# Altium PCB PCB1.PcbDoc
Units mil, origin at the board's own origin, x right, y up, seen from the top; angles counter-clockwise.
Board outline 6000 x 4000 mil, 2 copper layers (Top Layer, Bottom Layer); 20 components, 32 nets, 129 pads, 0 vias.
Unrouted connection lines stored in the file: 71.
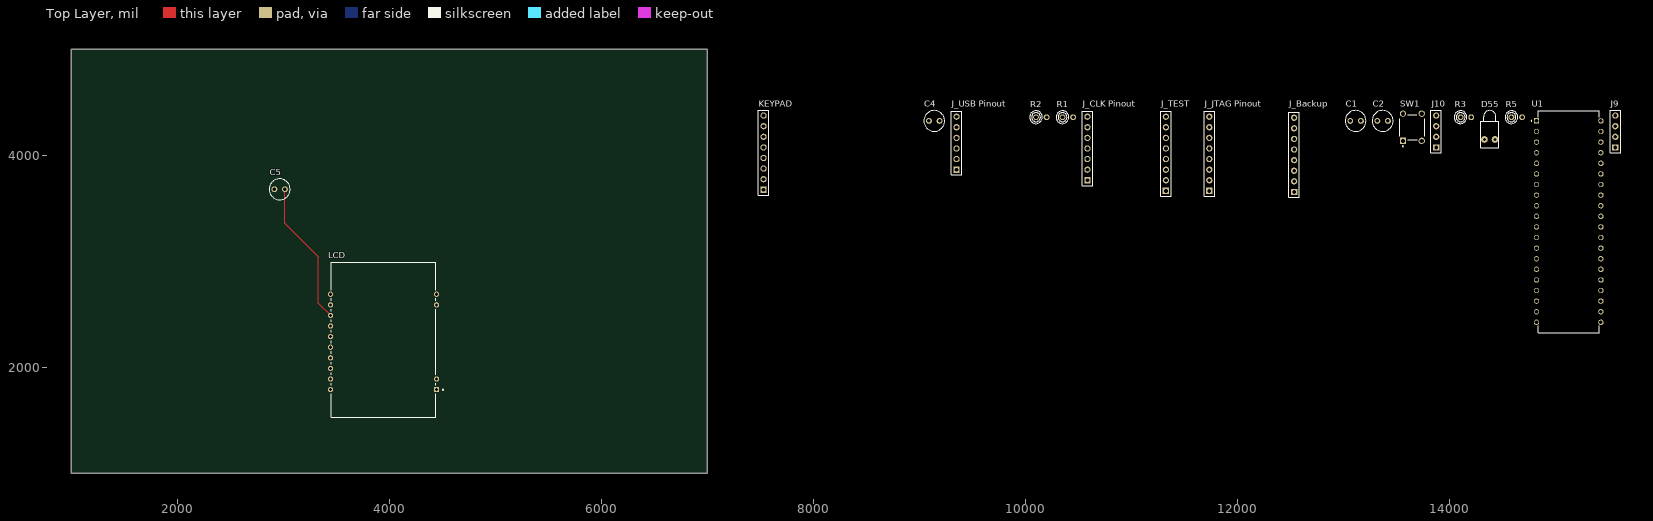
[diagram p0: Top Layer view]
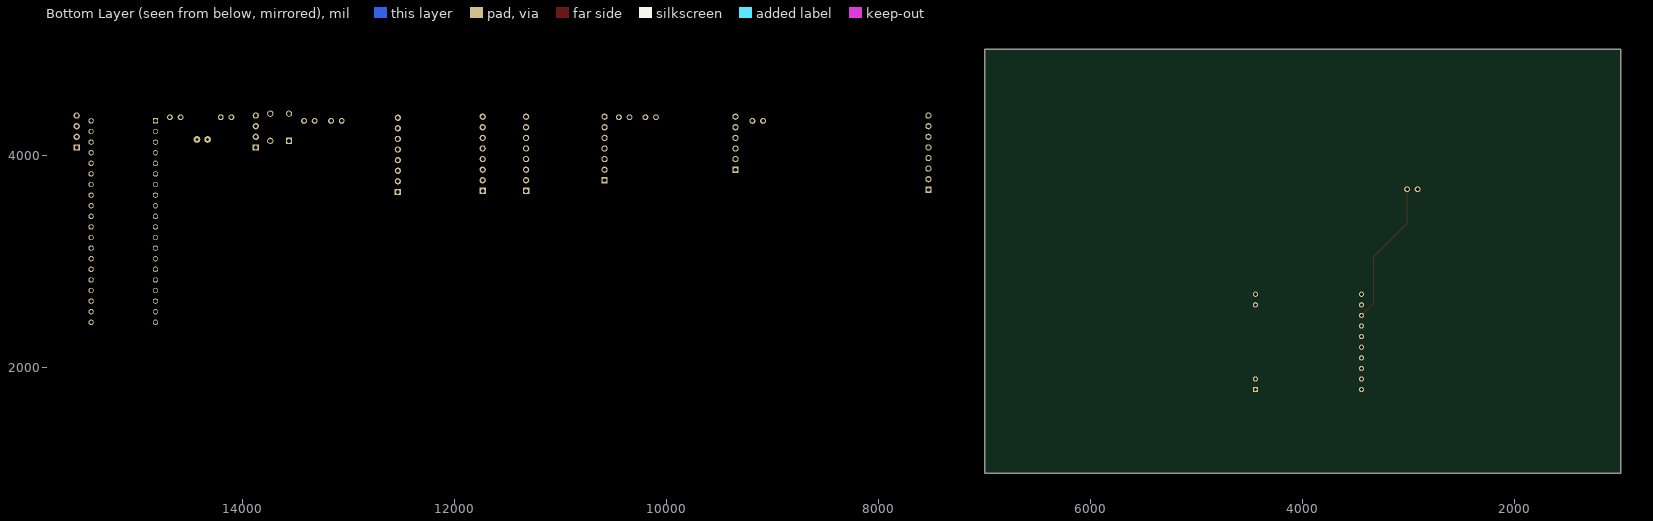
[diagram p1: Bottom Layer view, seen from below]

## Layer stack, top to bottom
Top Solder: solder mask 0.4, Solder Resist, Dk 3.5
Top Layer: signal copper 1.4
Dielectric 1: dielectric 12.6, FR-4, Dk 4.8
Bottom Layer: signal copper 1.4
Bottom Solder: solder mask 0.4, Solder Resist, Dk 3.5

## Board outline
1000,1000 7000,1000 7000,5000 1000,5000

## Design rules (kind name [scope] priority, off if disabled: settings)
Clearance [All] p1: gap=10 ignorepadtopadclearanceinfootprint=FALSE except(0: Arc-Hole Track-Hole SMDPad-Hole THPad-Hole Via-Hole Fill-Hole Poly-Hole Region-Hole Text-Hole)
PolygonConnect [All] p1: connectstyle=Relief reliefconductorwidth=10 reliefentries=4 polygonreliefangle="90 Angle" airgapwidth=10
RoomDefinition D1 [InComponentClass('D1')] p1: confinementstyle=ConfineIn formatcopy=TRUE lockcomponents=FALSE outline 7210,2315 15640,2315 15640,4535 7210,4535
RoutingVias [All] p1: holewidth=28 width=50 viastyle="Through Hole" minholewidth=28 minwidth=50 maxholewidth=28 maxwidth=50
SolderMaskExpansion [All] p1: expansion=4 istentingtop=FALSE
Width [All] p1: maxlimit=10 minlimit=10 preferedwidth=10
30 further rules are at their usual default settings.

## Components (designator, comment, footprint, x,y, rotation, side; value= is the part's Value field where it differs from the comment)
C1 "Cap" RADIAL-0.1 13115,4325 r0 top value=1UF
C2 "Cap" RADIAL-0.1 13370,4325 r0 top value=1UF
C4 "Cap" RADIAL-0.1 9140,4325 r0 top value=1UF
C5 "Cap" RADIAL-0.1 2965,3680 r0 top value=1UF
D55 "LED1" LED-1 14380,4150 r90 top
J9 "Header 4" HDR1X4 15565,4075 r90 top
J10 "Header 4" HDR1X4 13875,4075 r90 top
J_Backup "Header 8" HDR1X8 12535,3655 r90 top
"J_CLK Pinout" "Header 7" HDR1X7 10585,3765 r90 top
"J_JTAG Pinout" "Header 8" HDR1X8 11735,3665 r90 top
J_TEST "Header 8" HDR1X8 11325,3665 r90 top
"J_USB Pinout" "Header 6" HDR1X6 9350,3865 r90 top
KEYPAD "Header 8" HDR1X8 7530,3675 r90 top
LCD "EA DOGS104N-A" FP-EA_DOGS104N-A-MFG 3945,2259.68 r90 top
R1 "Res1" AXIAL-0.1-RES 10400,4360 r0 top value=10K
R2 "Res1" AXIAL-0.1-RES 10150,4360 r0 top value=10K
R3 "Res1" AXIAL-0.1-RES 14155,4360 r0 top value=120
R5 "Res1" AXIAL-0.1-RES 14635,4360 r0 top value=10K
SW1 "1825910-6" TECO-1825910-6_V 13650,4265 r90 top
U1 "ATMEGA324A-PU" "40-DIP (0.600\", 15.24mm)" 15125,3375 r0 top

## Footprints (in the part's own frame and the unit in brackets; to place one, negate y for a bottom-side part, rotate by r counter-clockwise, add the part's x,y. Pads: shape width x height; smd on the part's side, far side on the other; paste and mask are expansions set on the pad)
"40-DIP (0.600\", 15.24mm)" [mm]
  rect 1.28x1.28 hole 0.85: 1(-7.718,24.13)
  round 1.28 hole 0.85: 2(-7.718,21.59) 3(-7.718,19.05) 4(-7.718,16.51) 5(-7.718,13.97) 6(-7.718,11.43) 7(-7.718,8.89) 8(-7.718,6.35) 9(-7.718,3.81) 10(-7.718,1.27) 11(-7.718,-1.27) 12(-7.718,-3.81) 13(-7.718,-6.35) 14(-7.718,-8.89) 15(-7.718,-11.43) 16(-7.718,-13.97) 17(-7.718,-16.51) 18(-7.718,-19.05) 19(-7.718,-21.59) 20(-7.718,-24.13) 21(7.718,-24.13) 22(7.718,-21.59) 23(7.718,-19.05) 24(7.718,-16.51) 25(7.718,-13.97) 26(7.718,-11.43) 27(7.718,-8.89) 28(7.718,-6.35) 29(7.718,-3.81) 30(7.718,-1.27) 31(7.718,1.27) 32(7.718,3.81) 33(7.718,6.35) 34(7.718,8.89) 35(7.718,11.43) 36(7.718,13.97) 37(7.718,16.51) 38(7.718,19.05) 39(7.718,21.59) 40(7.718,24.13)
  silkscreen extent -9.02,-26.6 7.35,26.6
AXIAL-0.1-RES [mm] "Axial Device, Thru-Hole; 2 Leads; 0.3 in Pin Spacing"
  round 1.4 hole 0.85: 1(-1.27,0) 2(1.27,0)
  silkscreen extent -2.8,-1.53 0.26,1.53
FP-EA_DOGS104N-A-MFG [mm]
  rect 1.25x1.25 hole 0.75 paste-1000 mask+0: 1(-11.93,-12.7)
  round 1.25 hole 0.75 paste-1000 mask+0: 2(-9.39,-12.7) 9(8.39,-12.7) 10(10.93,-12.7) 11(10.93,12.7) 12(8.39,12.7) 13(5.85,12.7) 14(3.31,12.7) 15(0.77,12.7) 16(-1.77,12.7) 17(-4.31,12.7) 18(-6.85,12.7) 19(-9.39,12.7) 20(-11.93,12.7)
  silkscreen extent -18.6,-14.38 18.6,12.55, body extent -18.7,-13.42 18.7,13.42, height 0.25
HDR1X4 [mm] "Connector; Header; 4 Position"
  rect 1.5x1.5 hole 0.9: 1(0,0)
  round 1.5 hole 0.9: 2(2.54,0) 3(5.08,0) 4(7.62,0)
  silkscreen extent -1.27,-1.27 8.89,1.27
HDR1X6 [mm] "Connector; Header; 6 Position"
  rect 1.5x1.5 hole 0.9: 1(0,0)
  round 1.5 hole 0.9: 2(2.54,0) 3(5.08,0) 4(7.62,0) 5(10.16,0) 6(12.7,0)
  silkscreen extent -1.27,-1.27 13.97,1.27
HDR1X7 [mm] "Connector; Header; 7 Position"
  rect 1.5x1.5 hole 0.9: 1(0,0)
  round 1.5 hole 0.9: 2(2.54,0) 3(5.08,0) 4(7.62,0) 5(10.16,0) 6(12.7,0) 7(15.24,0)
  silkscreen extent -1.27,-1.27 16.51,1.27
HDR1X8 [mm] "Connector; Header; 8 Position"
  rect 1.5x1.5 hole 0.9: 1(0,0)
  round 1.5 hole 0.9: 2(2.54,0) 3(5.08,0) 4(7.62,0) 5(10.16,0) 6(12.7,0) 7(15.24,0) 8(17.78,0)
  silkscreen extent -1.27,-1.27 19.05,1.27
LED-1 [mm] "LED; 2 Leads"
  round 1.6 hole 0.8: 1(0,1.27) 2(0,-1.27)
  silkscreen extent -2,-2.2 6.95,2.2
RADIAL-0.1 [mm] "Axial Device, Thru-Hole; 2 Leads; 0.3 in Pin Spacing"
  round 1.4 hole 0.85: 1(-1.27,0) 2(1.27,0)
  silkscreen extent -2.5,-2.5 2.5,2.5
TECO-1825910-6_V [mm] "Switch, 4-Leads, Body 5.99x5.99mm"
  rect 1.5x1.5 hole 0.99: 1(-3.25,2.25)
  round 1.5 hole 0.99: 2(3.25,2.25) 3(-3.25,-2.25) 4(3.25,-2.25)
  silkscreen extent -4.67,-2.99 2.99,3, body extent -3,-2.99 2.99,3, height 5

## Part data
C1 C2 C4 C5: library part "CAP CER 1UF 50V X7R RADIAL", "Capacitor", Manufacturer Part Number=C333C105K5R5TA7301, Voltage Rating=50V, LatestRevisionDate=17-Jul-2002, LatestRevisionNote="Re-released for DXP Platform.", Published=8-Jun-2000, Publisher="Altium Limited"
D55: "Typical RED GaAs LED", LatestRevisionDate=08-Jul-2005, LatestRevisionNote="Mech Layer 1 removed.", PackageDescription="LED; 2 Leads", PackageReference=LED-1, Published=8-Jun-2000, Publisher="Altium Limited"
J9 J10: "Conn Header Vert 4POS 2.54MM", Color=Black, Manufacturer=Sullins, Manufacturer Part Number=PRPC004SAAN-RC, Package Quantity=1, Supplier Part Number 1=S1011EC-04-ND, Category=Connectors, ComponentLink1Description=https://datasheet.ciiva.com/741/xrxczzzsxxn-rc-st-11635-b-741241.pdf?src-supplier=Digi-Key, ComponentLink1URL=https://datasheet.ciiva.com/741/xrxczzzsxxn-rc-st-11635-b-741241.pdf?src-supplier=Digi-Key, Connector Type="Male Pin", Contact Mating Length=0.23inch, Contact Plating=Gold, Contact Type="Male Pin", LatestRevisionDate=17-Jul-2002, LatestRevisionNote="Re-released for DXP Platform.", Mount="Through Hole", Number of Positions=4, Number of Rows=1, Packaging=Bulk, Pitch=0.1inch, Pricing 1="1=0.15000, 10=0.14600, 25=0.10840, 50=0.09280, 100=0.08980, 250=0.07740, 500=0.07430 (USD)", Publisher="Altium Limited", RoHS=Yes, RoHS Compliant=Yes, Series=-, Stock 1=11663, Supplier 1=Digi-Key, Termination=Solder
J_Backup "J_JTAG Pinout" J_TEST KEYPAD: "Conn Header Vert 8POS 2.54MM", Color=Black, Manufacturer=Sullins, Manufacturer Part Number=PRPC008SAAN-RC, Package Quantity=1, Supplier Part Number 1=S1011EC-08-ND, Category=Connectors, ComponentLink1Description=https://datasheet.ciiva.com/741/xrxczzzsxxn-rc-st-11635-b-741237.pdf?src-supplier=Digi-Key, ComponentLink1URL=https://datasheet.ciiva.com/741/xrxczzzsxxn-rc-st-11635-b-741237.pdf?src-supplier=Digi-Key, Connector Type="Male Pin", Contact Mating Length=0.23inch, Contact Plating=Gold, Contact Type="Male Pin", LatestRevisionDate=17-Jul-2002, LatestRevisionNote="Re-released for DXP Platform.", Lead Free="Lead Free", Mount="Through Hole", Number of Positions=8, Number of Rows=1, Packaging=Bulk, Pitch=0.1inch, Pricing 1="1=0.25000, 10=0.23200, 25=0.19800, 50=0.17340, 100=0.16100, 250=0.14240, 500=0.13622 (USD)", Publisher="Altium Limited", RoHS=Yes, RoHS Compliant=Yes, Series=-, Supplier 1=Digi-Key, Termination=Solder
  J_Backup J_TEST: Stock 1=4475
  "J_JTAG Pinout": Stock 1=5110
  KEYPAD: Stock 1=4930
"J_CLK Pinout": "Female, 7C, Straight, .100\"CC; 3.20mm Tail, No Mt. 100u\" Tin; PBT, Phos Bronze, 105 C", Color=Black, Manufacturer=Sullins, Manufacturer Part Number=PPTC071LFBN-RC, Package Quantity=1000, Supplier Part Number 1=S7005-ND, Category=Connectors, ComponentLink1Description=https://media.digikey.com/pdf/Data%20Sheets/Sullins%20PDFs/Female_Headers.100_DS.pdf?src-supplier=Digi-Key, ComponentLink1URL=https://media.digikey.com/pdf/Data%20Sheets/Sullins%20PDFs/Female_Headers.100_DS.pdf?src-supplier=Digi-Key, ComponentLink2Description=http://www.sullinscorp.com/catalogs/78_Page80-81_HEADER_.100_2.54mm_FEMALE.pdf?src-supplier=Future+Electronics, ComponentLink2URL=http://www.sullinscorp.com/catalogs/78_Page80-81_HEADER_.100_2.54mm_FEMALE.pdf?src-supplier=Future+Electronics, Connector Type=Header, Contact Material=Bronze, Contact Plating=Tin, Contact Type="Female Socket", Height=8.5mm, Housing Material=Plastic, LatestRevisionDate=17-Jul-2002, LatestRevisionNote="Re-released for DXP Platform.", Lead Free="Lead Free", Length=18.3mm, Mount="Through Hole", Number of Positions=7, Number of Rows=1, Packaging=Bulk, Pitch=0.1inch, Pricing 1="1=0.59000, 10=0.51500, 80=0.42438, 440=0.36900, 1000=0.30442, 5000=0.26752, 10000=0.26650 (USD)", Publisher="Altium Limited", RoHS=Yes, Stock 1=31167, Supplier 1=Digi-Key, Termination=Solder, Width=2.5mm
"J_USB Pinout": "Conn Header .100\" Sngl Str 6POS", Color=Black, Manufacturer=Sullins, Manufacturer Part Number=PRPC006SAAN-RC, Package Quantity=1, Supplier Part Number 1=S1011EC-06-ND, Category=Connectors, ComponentLink1Description=https://datasheet.ciiva.com/741/xrxczzzsxxn-rc-st-11635-b-741239.pdf?src-supplier=Digi-Key, ComponentLink1URL=https://datasheet.ciiva.com/741/xrxczzzsxxn-rc-st-11635-b-741239.pdf?src-supplier=Digi-Key, Connector Type="Male Pin", Contact Mating Length=0.23inch, Contact Plating=Gold, Contact Type="Male Pin", LatestRevisionDate=17-Jul-2002, LatestRevisionNote="Re-released for DXP Platform.", Lead Free="Lead Free", Mount="Through Hole", Number of Positions=6, Number of Rows=1, Packaging=Bulk, Pitch=0.1inch, Pricing 1="1=0.19000, 10=0.17400, 25=0.14880, 50=0.13000, 100=0.12070, 250=0.10680, 500=0.10216 (USD)", Publisher="Altium Limited", RoHS=Yes, RoHS Compliant=Yes, Series=-, Stock 1=14553, Supplier 1=Digi-Key, Termination=Solder
LCD: library part CMP-140401-000002-2, "LCD MOD 40DIG 10X4 TRANSFLECTIVE", Colour=White, Manufacturer="Display Visions", Package=0, Temperature="-20°C to +70°C", Temperature Range High=+70°C, Temperature Range Low=-20°C, Automotive=No, Category=Disp, ComponentLink2Description=Datasheet, ComponentLink2URL=https://www.lcd-module.de/fileadmin/html-seiten/eng/pdf/doma/dogs104e.pdf, Device Class L1=Optoelectronics, Device Class L2=Displays, Device Class L3=LCD, Digikey Description="LCD MOD 40DIG 10X4 TRANSFLECTIVE", Display Type=LCD, Height=4.6mm, Interface=I2C,SPI, Lead Free=Yes, Manufacturer Part Number="EA DOGS104N-A", Number Of Characters=40, Octopart=https://octopart.com/ea+dogs104n-a-display+visions-99339937, RoHS=TRUE, Standoff Height=1.5mm, Viewing Angle=180°
R1 R2 R5: library part "RES 10K OHM 5% 1/4W AXIAL", "Resistor", Manufacturer Part Number=CFR-25JB-52-10K, Power Rating=1/4W, Tolerance=0.05, LatestRevisionDate=17-Jul-2002, LatestRevisionNote="Re-released for DXP Platform.", Published=8-Jun-2000, Publisher="Altium Limited"
R3: library part "RES 120 OHM 5% 1/4W AXIAL", "Resistor", Manufacturer Part Number=CFR-25JB-52-120R, Power Rating=1/4W, Tolerance=0.05, LatestRevisionDate=17-Jul-2002, LatestRevisionNote="Re-released for DXP Platform.", Published=8-Jun-2000, Publisher="Altium Limited"
SW1: library part CMP-1684-00021-1, "Tact Switch, SPST-NO, 0.05 A, -35 to 85 degC, 4-Pin THD, RoHS, Bulk", Actuator Color=Black, Contact Rating @ Voltage=0.05A@24VDC, Dielectric Strength=500VAC, Manufacturer="TE Connectivity", Maximum AC Voltage Rating=N/A, Maximum Contact Resistance=100mOhm, Maximum DC Voltage Rating=24V, Minimum Insulation Resistance=100MOhm, Operating Temperature=-35to85C, Package Description="4-Pin Through Hole Device, Body 5.99 x 5.99 mm, Pitch 6.5 mm", Package Reference=THD, Actuator Length=1.4mm, Actuator Material=PolybutyleneTerephthalate, Actuator Style=RoundButton, Base Material=N/A, Body Orientation=Straight, Bushing Type=Unthreaded, Contact Material=CopperAlloy, Contact Plating=Silver, Datasheet URL=http://www.te.com/commerce/DocumentDelivery/DDEController?Action=showdoc&DocId=Customer+Drawing%7F1825910%7FC9%7Fpdf%7FEnglish%7FENG_CD_1825910_C9.pdf%7F1825910-6, Datasheet Version="Rev. C9", Dimension=5.99x5mm, Electrical Life=100000Cycles, Family=1825910, Function=MomentaryContact, Housing Material=N/A, Illumination=N/R, Manufacturer URL=http://www.te.com, Mechanical Life=100000Cycles, Mounting=ThroughHole, Packaging=N/A, Part No=1825910-6, Pole Throw Configuration=SPST, Product Weight=N/A, RoHS=Yes, Seal Description=N/A, Seal Location=N/A, Switch Configuration=OFF(ON), Terminal Type=PCPins, Thread Size=N/R
U1: "AVR series Microcontroller IC 8-Bit 20MHz 32KB (16K x 16) FLASH 40-PDIP", Package="PDIP-40 Microchip", Availability="In Stock", Check_prices=https://www.snapeda.com/parts/ATMEGA324A-PU/Microchip/view-part/?ref=eda, Manufacturer Part Number=ATMEGA324A-PU, MF="Microchip Technology", MP=ATMEGA324A-PU, Price=None, Purchase-URL=https://pricing.snapeda.com/search/part/ATMEGA324A-PU/?ref=eda, SnapEDA_Link=https://www.snapeda.com/parts/ATMEGA324A-PU/Microchip/view-part/?ref=snap

## Nets (pads, with @x,y where several pads share a name; then routed paths per layer and width w, separated by ;. In a path a pad name is that pad's centre, name@x,y a point inside that pad or via, vN(x,y) a via of type N, cw(c..) or ccw(c..) an arc to the next point about the centre after c; other vN are vias at no path point)
+3.3V: "J_CLK Pinout.1" "J_JTAG Pinout.2" "J_USB Pinout.4" C1.1 C2.1 C5.2 D55.1 J10.3 LCD.13 R1.1 R2.1 R5.2 U1.10 U1.30 | length 1368.1
  Top Layer w10: C5.2 3015,3360 3330,3045 3330,2605 LCD.13
/TXEN: J9.1 J_TEST.1 U1.16
BK1: J_Backup.1 U1.17
BK2: J_Backup.2 U1.18
BK3: J_Backup.3 U1.19
BK4: J_Backup.4 U1.20
BK5: J_Backup.5 U1.39
BK6: J_Backup.6 U1.28
BK7: J_Backup.7 U1.29
BK8: J_Backup.8 U1.21
DISPRST: LCD.20 U1.40
GND: "J_CLK Pinout.2" "J_JTAG Pinout.3" "J_USB Pinout.6" C1.2 C2.2 C4.2 C5.1 J9.4 J10.4 LCD.12 LCD.14 LCD.18 LCD.19 R3.1 SW1.1 U1.11 U1.31 U1.32
KPD1: KEYPAD.1 U1.1
KPD2: KEYPAD.2 U1.2
KPD3: KEYPAD.3 U1.3
KPD4: KEYPAD.4 U1.4
KPD5: KEYPAD.5 U1.5
KPD6: KEYPAD.6 U1.6
KPD7: KEYPAD.7 U1.7
KPD8: KEYPAD.8 U1.8
LO_F1_0: "J_CLK Pinout.7" J9.2
LO_F1_90: "J_CLK Pinout.6" J9.3
NetC4_1: C4.1 LCD.11
RST: "J_JTAG Pinout.6" R5.1 SW1.2 U1.9
RXD: "J_USB Pinout.3" J_TEST.5 U1.14
SCL: "J_CLK Pinout.4" J_TEST.2 LCD.17 R2.2 U1.22
SDA: "J_CLK Pinout.3" J_TEST.3 LCD.15 LCD.16 R1.2 U1.23
TCK: "J_JTAG Pinout.5" U1.24
TDI: "J_JTAG Pinout.7" U1.27
TDO: "J_JTAG Pinout.4" U1.26
TMS: "J_JTAG Pinout.8" U1.25
TXD: "J_USB Pinout.2" J_TEST.4 U1.15
pads on no net: "J_CLK Pinout.5" "J_JTAG Pinout.1" "J_USB Pinout.1" "J_USB Pinout.5" D55.2 J10.1 J10.2 J_TEST.6 J_TEST.7 J_TEST.8 LCD.1 LCD.2 LCD.9 LCD.10 R3.2 SW1.3 SW1.4 U1.12 U1.13 U1.33 U1.34 U1.35 U1.36 U1.37 U1.38